# Altium PCB Power.PcbDoc
Units mil, origin at the board's own origin, x right, y up, seen from the top; angles counter-clockwise.
Board outline 1350 x 1150 mil, 2 copper layers (Top Layer, Bottom Layer), stack 12.8 mil thick; 23 components, 15 nets, 55 pads, 4 vias.
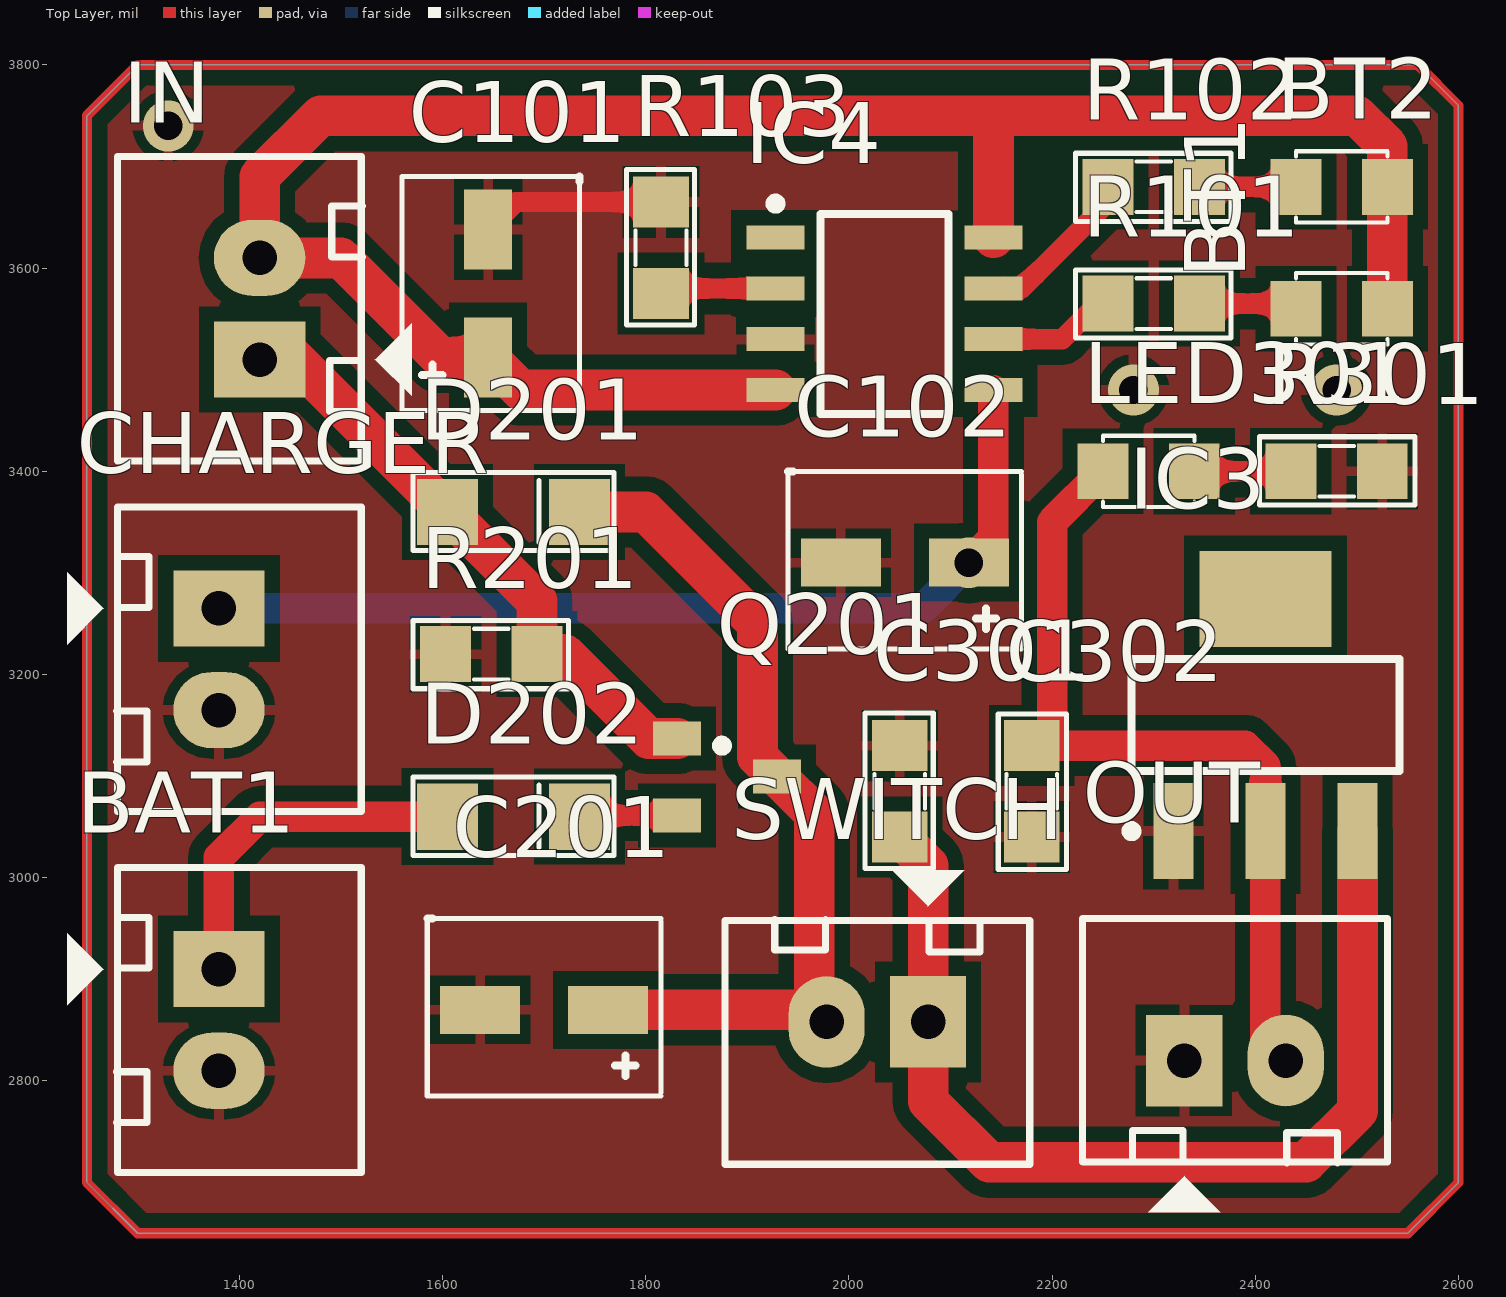
[diagram p0: Top Layer view]
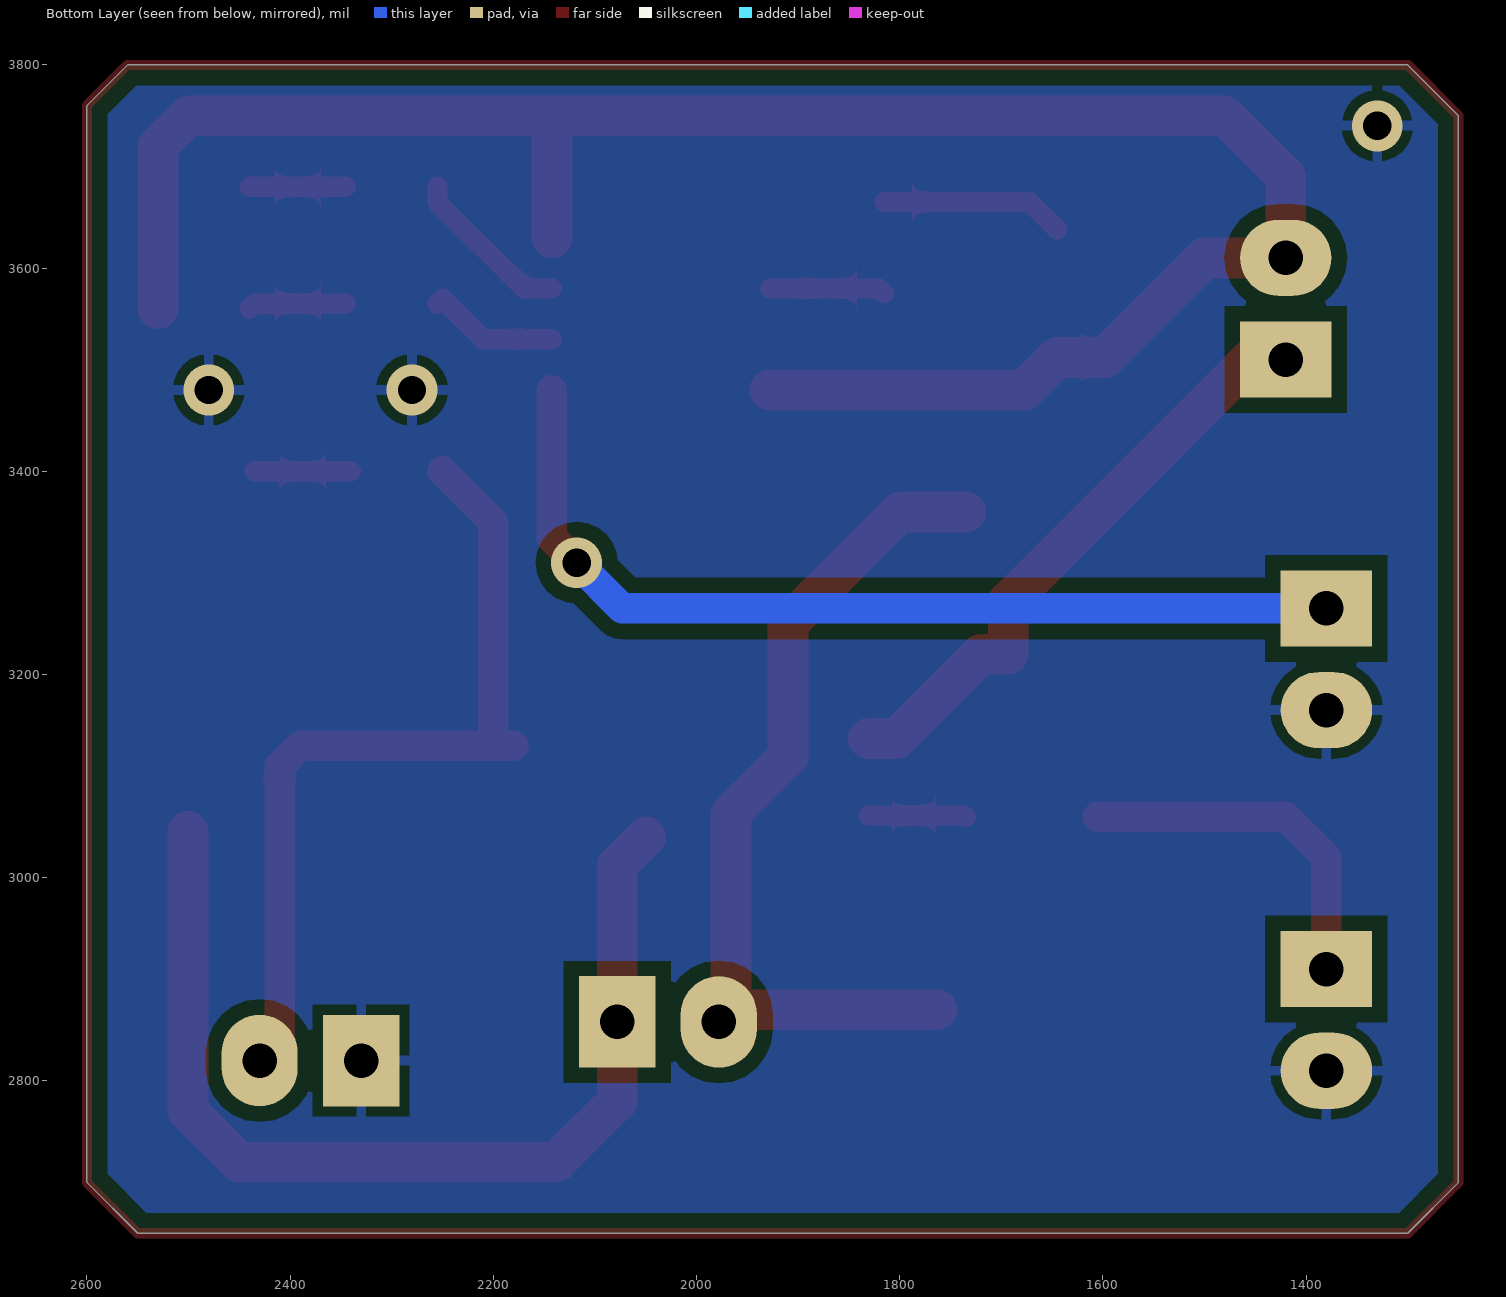
[diagram p1: Bottom Layer view, seen from below]
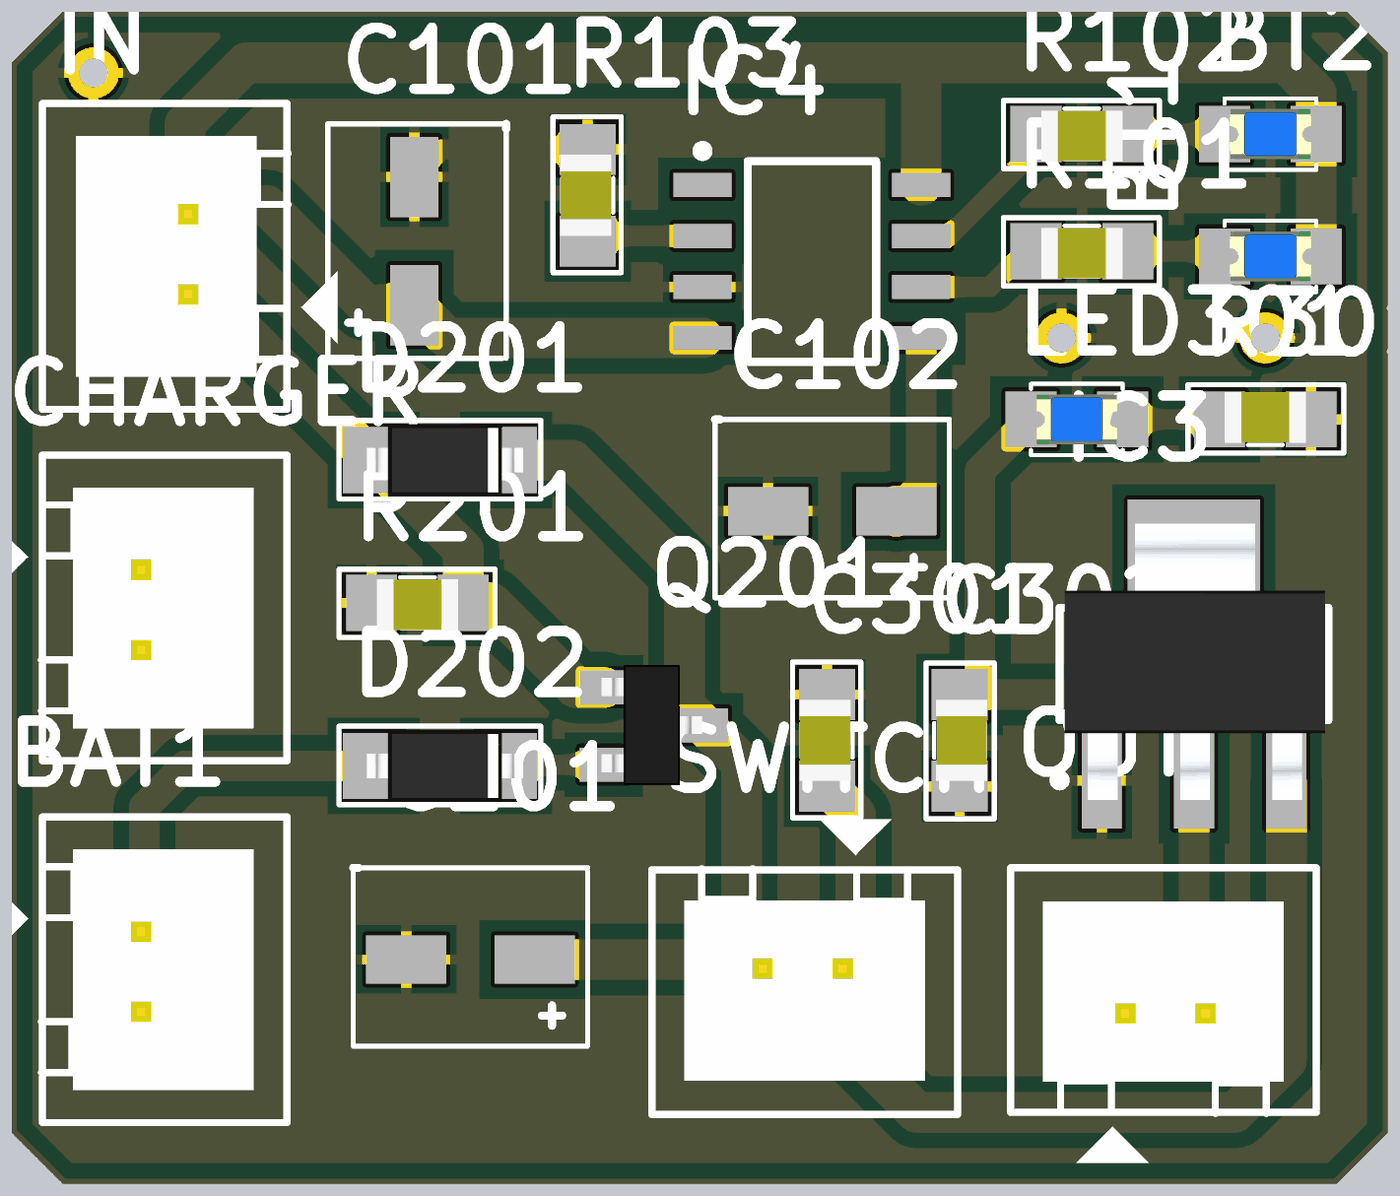
[diagram p2: 3D render of the assembled board from above, using the file's embedded part models]

## Layer stack, top to bottom
Top Layer: signal copper 1.4
Dielectric 1: core 10, FR-4, Dk 4.2
Bottom Layer: signal copper 1.4

## Board outline
1250,2700 1250,3750 1300,3800 2560,3800 2600,3760 2600,2700 2550,2650 1300,2650

## Design rules (kind name [scope] priority, off if disabled: settings)
Clearance [All] p1: gap=15
PolygonConnect [All] p1: connectstyle=Relief reliefconductorwidth=10 reliefentries=4 polygonreliefangle="90 Angle" airgapwidth=10
RoutingVias [All] p1: holewidth=28 width=50 viastyle="Through Hole" minholewidth=28 minwidth=50 maxholewidth=28 maxwidth=50
SolderMaskExpansion [All] p1: expansion=4
Width VCC_SOON1 [InNet('VCC_SOON1')] p1: maxlimit=40 minlimit=40 preferedwidth=40
Width VBAT1 [InNet('BAT')] p2: maxlimit=30 minlimit=30 preferedwidth=30
Width VBAT [InNet('BAT+')] p3: maxlimit=30 minlimit=30 preferedwidth=30
Width VCC_3.3 [InNet('VCC_3.3V')] p4: maxlimit=30 minlimit=30 preferedwidth=30
Width VCC_SOON [InNet('VCC_SOON')] p5: maxlimit=40 minlimit=40 preferedwidth=40
Width VCC_5V1 [InNet('VCC_5V1')] p6: maxlimit=40 minlimit=40 preferedwidth=40
Width VCC_5V2 [InNet('VCC_5V2')] p7: maxlimit=40 minlimit=40 preferedwidth=40
Width [All] p8: maxlimit=20 minlimit=20 preferedwidth=20
30 further rules are at their usual default settings.

## Components (designator, comment, footprint, x,y, rotation, side; value= is the part's Value field where it differs from the comment)
BAT1 "JP2" CON2 1380,2910 r270 top
BT1 "LED" LED0805-Blue 2530,3560 r180 top
BT2 "LED" LED0805-Blue 2530,3680 r180 top
C101 "10uF/16V" CAP-B-22UF/16V 1645,3575 r90 top
C102 "10uF/16V" CAP-B-22UF/16V 2055,3310 r180 top
C201 "10uF/16V" CAP-B-22UF/16V 1700,2870 r180 top
C301 "103" SM-0805 2050,3085 r270 top
C302 "103" SM-0805 2180,3085 r90 top
CHARGER "JP2" CON2 1380,3265 r270 top
D201 "3V3" Diode1206 1670,3360 r0 top
D202 "3V3" Diode1206 1670,3060 r0 top
IC3 "LM1117" SOT223-4N 2410,3160 r90 top
IC4 "TP4056-1A" TP4056-1A 2035,3555 r0 top
IN "H1" CON2 1420,3510 r90 top
LED301 "POWER" LED0805-Blue 2250,3400 r0 top
OUT "H2" CON2 2330,2820 r0 top
Q201 "IRF9540" SOT23A 1880,3100 r270 top
R101 "330" SM-0805 2300,3565 r0 top
R102 "330" SM-0805 2300,3680 r0 top
R103 "1k" SM-0805 1815,3620 r270 top
R201 "10K" SM-0805 1648,3220 r0 top
R301 "330" SM-0805 2480,3400 r180 top
SWITCH "JP2" CON2 2078,2858 r180 top

## Footprints (in the part's own frame and the unit in brackets; to place one, negate y for a bottom-side part, rotate by r counter-clockwise, add the part's x,y. Pads: shape width x height; smd on the part's side, far side on the other; paste and mask are expansions set on the pad)
CAP-B-22UF/16V [mm]
  rect 2x1.2 smd: 1(-1.6,0) 2(1.6,0)
  silkscreen extent -2.92,-2.29 2.92,2.16
CON2 [mil] "CON2"
  rect 75x90 hole 34: 1(0,0)
  oval 75x90 hole 34: 2(100,0)
  silkscreen extent -100,-150 200,140, body extent -68,-70 168,107, height 236
Diode1206 [mil]
  rect 60x65 smd: 1(-65,0) 2(65,0)
  silkscreen extent -99,-38 99,39, body extent -72,-35 82,35, height 46
LED0805-Blue [mil]
  rect 50x55 smd: 1(0,0) 2(90,0)
  silkscreen extent 0,-35 90,35, body extent 5,-25 85,25, height 43
SM-0805 [mil] "Compoment SMD 80x50mil"
  rect 50x55 smd: 1(-45,0) 2(45,0)
  silkscreen extent -77,-34 76,33, body extent -40,-27 40,23, height 24
SOT23A [mm] "SOT 23A"
  rect 0.85x1.2 smd: 1(-0.94,-1.245) 2(0.005,1.25) 3(0.985,-1.25)
  silkscreen extent -0.88,-0.25 -0.64,0, body extent -1.5,-1.3 1.5,1.2, height 1.06
SOT223-4N [mm] "SOT223, 4-Leads, Body 6.5x3.5mm, Pitch 2.3mm, Lead Span 7mm, IPC Medium Density"
  rect 2.4x1 smd: 1(-2.9,2.3) 2(-2.9,0) 3(-2.9,-2.3)
  rect 2.4x3.3 smd: 4(2.9,0)
  silkscreen extent -3.02,-3.35 1.4,3.47, body extent -3.39,-3.27 3.5,3.23, height 1.72
TP4056-1A [mm] "TP4056-1A, 8-Leads, Body 4.90x3.90mm, Pitch 1.27mm, IPC Medium Density"
  rect 1.45x0.6 smd: 1(-2.725,1.905) 2(-2.725,0.635) 3(-2.725,-0.635) 4(-2.725,-1.905) 5(2.725,-1.905) 6(2.725,-0.635) 7(2.725,0.635) 8(2.725,1.905)
  silkscreen extent -2.85,-2.5 1.6,2.88, body extent -2,-2.5 2,2.5, height 1.75

## Part data
BAT1 CHARGER SWITCH: library part Con2, "Connector 2"
BT1 BT2: "LED Single colour Green and Red"
C101 C102 C201: library part CP3, "Cap 100uF/35V - 470uF/16V"
C301 C302: library part CM, "Cap SMD"
D201 D202: library part DZ, "Diode Zenner"
IC3: "3v3"
IN OUT: library part Hed2, "Header 2 (Green)"
LED301: library part LED, "LED Single colour Green and Red"
Q201: "HEXFET P-Channel Power MOSFET"
R101 R102 R103 R201 R301: library part R, "Resistor 1/4W"

## Via types
v1: diameter 50, hole 28, Top Layer to Bottom Layer, 4 vias

## Nets (pads, with @x,y where several pads share a name; then routed paths per layer and width w, separated by ;. In a path a pad name is that pad's centre, name@x,y a point inside that pad or via, vN(x,y) a via of type N, cw(c..) or ccw(c..) an arc to the next point about the centre after c; other vN are vias at no path point)
BAT: BAT1.1 D202.1 | length 351.6
  Top Layer w30: BAT1.1 1380,3020 1420,3060 D202.1
BAT+: C102.1 CHARGER.1 IC4.5 | length 936.7
  Top Layer w30: v1(2117.99,3310) 2142.28,3334.29 IC4.5
  Bottom Layer w30: CHARGER.1 2072.99,3265 v1(2117.99,3310)
GND: BAT1.2 C101.2 C102.2 C201.2 C301.1 C302.1 CHARGER.2 IC3.1 IC4.3 OUT.1 R103.1 R201.1 R301.1 | length 181.2
  Top Layer w20: C101.2 1672.01,3665 R103.1
  other v1: 2280,3480 2480,3480 1330,3740
NetBT1_2: BT1.2 R101.2 | length 97.1
  Top Layer w20: R101.2 2435,3565 BT1.2
NetBT2_2: BT2.2 R102.2 | length 95
  Top Layer w20: R102.2 BT2.2
NetD202_2: D202.2 Q201.3 | length 96.3
  Top Layer w20: D202.2 1736.2,3061.2 Q201.3
NetIC4_2: IC4.2 R103.2 | length 114.8
  Top Layer w20: R103.2 1820,3580 IC4.2
NetIC4_6: IC4.6 R101.1 | length 131.4
  Top Layer w20: IC4.6 2210,3530 2250,3570 R101.1
NetIC4_7: IC4.7 R102.1 | length 162.9
  Top Layer w20: IC4.7 2170,3580 2255,3665 R102.1
NetLED301_2: LED301.2 R301.2 | length 95
  Top Layer w20: LED301.2 R301.2
VCC_3.3V: C302.2 IC3.2 LED301.1 | length 827.3
  Top Layer w30: C302.2 2390,3130 2410,3110 IC3.2 2410,2840 2430,2820 ; C302.2@2200,3130 2200,3350 LED301.1
VCC_5V1: C201.1 D201.2 Q201.2 SWITCH.2 | length 843.7
  Top Layer w40: D201.2 1800,3360 1910,3250 1910,3119.01 Q201.2 1966,3063.01 SWITCH.2@1966,2870 ; C201.1 SWITCH.2@1966,2870 ; SWITCH.2 SWITCH.2@1966,2870
VCC_5V2: C301.2 IC3.3 SWITCH.1 | length 1015.2
  Top Layer w40: C301.2 2078,3012 SWITCH.1 2078,2780 2138,2720 2450,2720 2500.55,2770.55 IC3.3
VCC_SOON: BT1.1 BT2.1 C101.1 IC4.4 IC4.8 IN.2 | length 2069.8
  Top Layer w40: IC4.4 1677.01,3480 C101.1 1597.99,3512.01 1500,3610 IN.2 1420,3690 1480,3750 2140,3750 ; IC4.8 2142.28,3747.72 2140,3750 ; BT1.1 BT2.1 2530,3720 2500,3750 2140,3750
VCC_SOON1: D201.1 IN.1 Q201.1 R201.2 | length 596
  Top Layer w40: IN.1 1455,3510 D201.1 1693,3272 R201.2 1720,3220 1803,3137 Q201.1
pads on no net: IC3.4 IC4.1 OUT.2
copper on no net: | length 4888.7
  Top Layer w10: 1250,2700 1300,2650 2550,2650 2600,2700 2600,3760 2560,3800 1300,3800 1250,3750 1250,2700

## Polygon pours and split planes (outlines as drawn)
GND on Top Layer "Keep-Out Layer-No Net" (solid, pour order 0): 1300,3800 1250,3750 1250,2700 1300,2650 2550,2650 2600,2700 2600,3760 2560,3800
GND on Bottom Layer "Keep-Out Layer-No Net" (solid, pour order 2): 1300,3800 2560,3800 2600,3760 2600,2700 2550,2650 1300,2650 1250,2700 1250,3750